# Altium PCB Oasis_Heater_Testing_PCB.PcbDoc
Units mil, origin at the board's own origin, x right, y up, seen from the top; angles counter-clockwise.
Board outline 1275 x 2430 mil, 2 copper layers (Top Layer, Bottom Layer), stack 62.992 mil thick; 17 components, 35 nets, 81 pads, 0 vias.
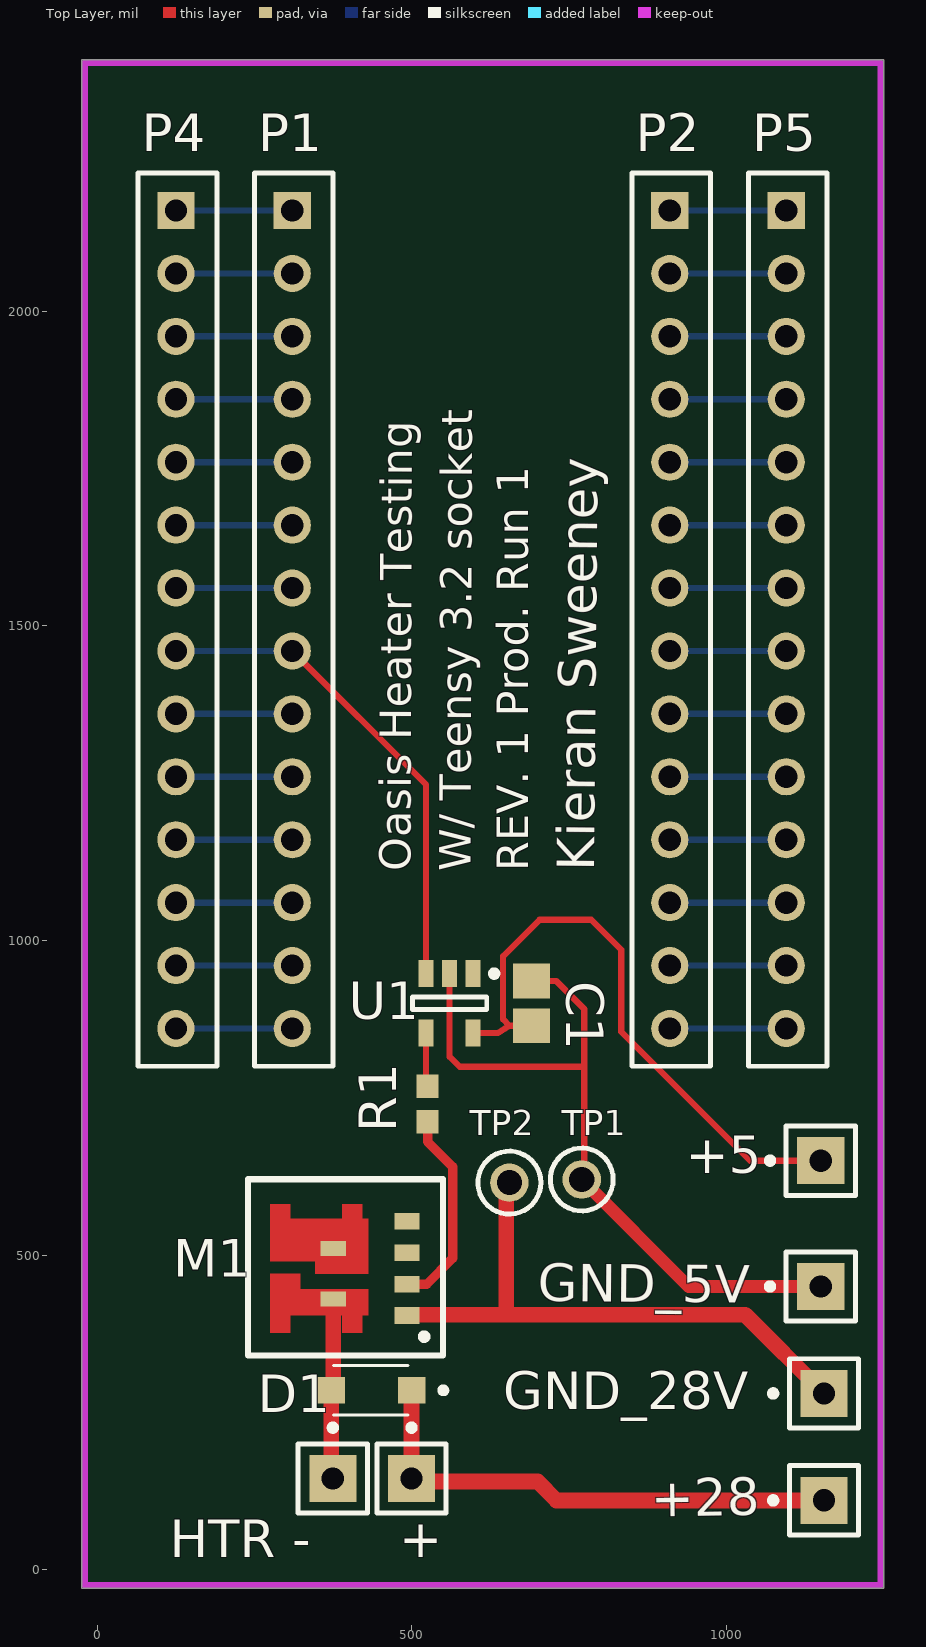
[diagram p0: Top Layer view]
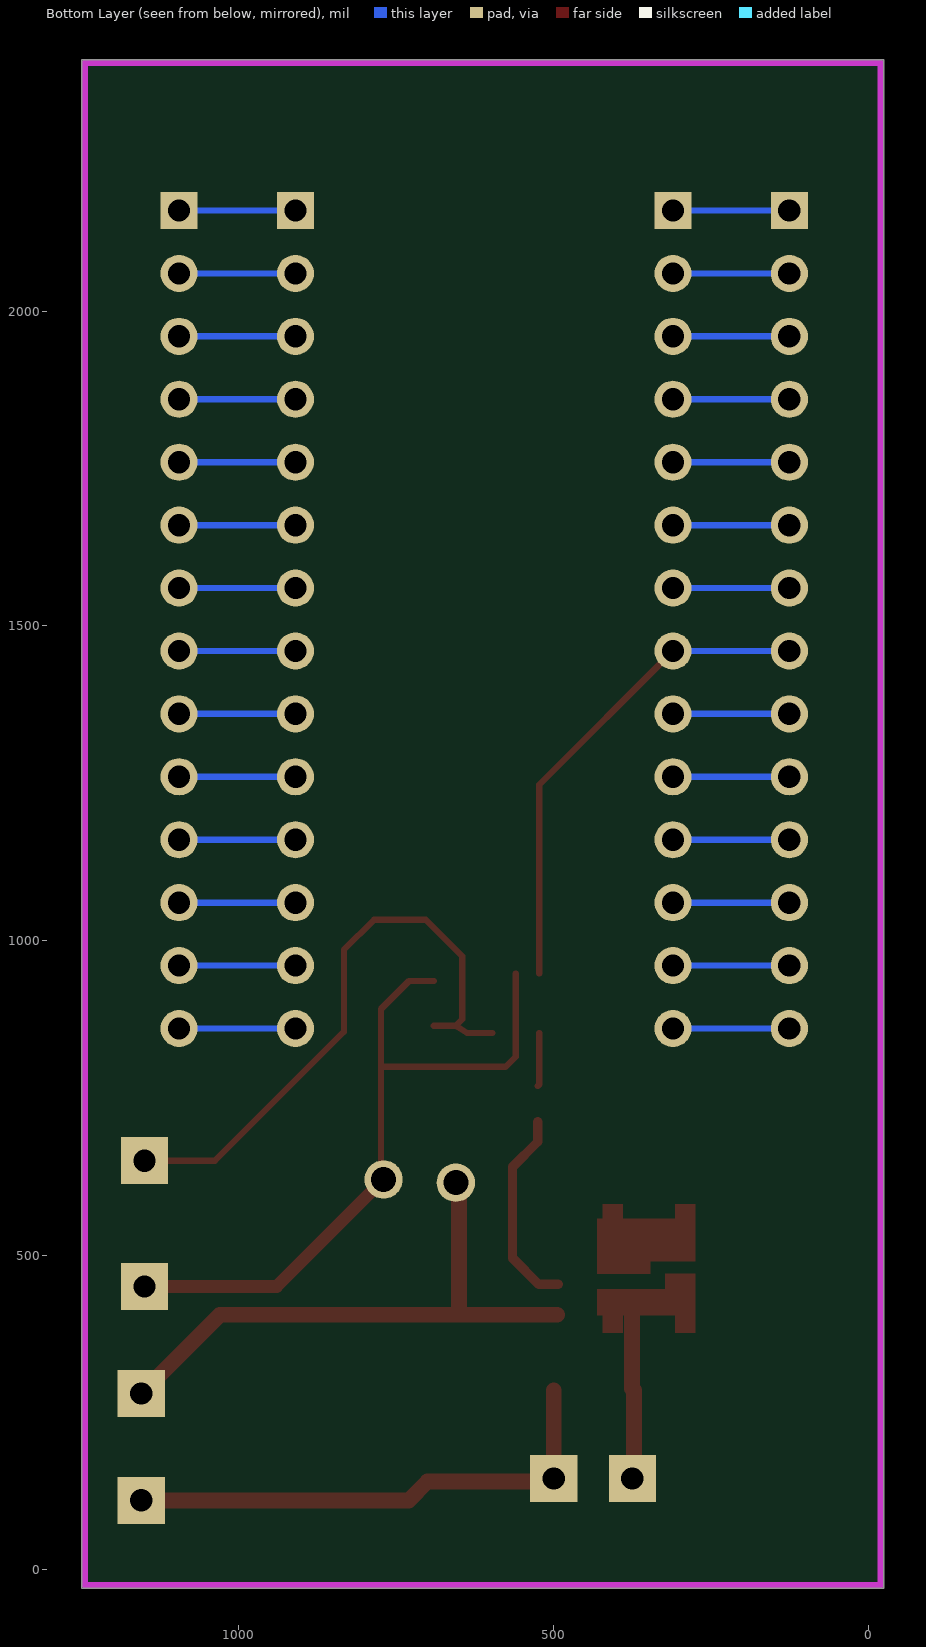
[diagram p1: Bottom Layer view, seen from below]
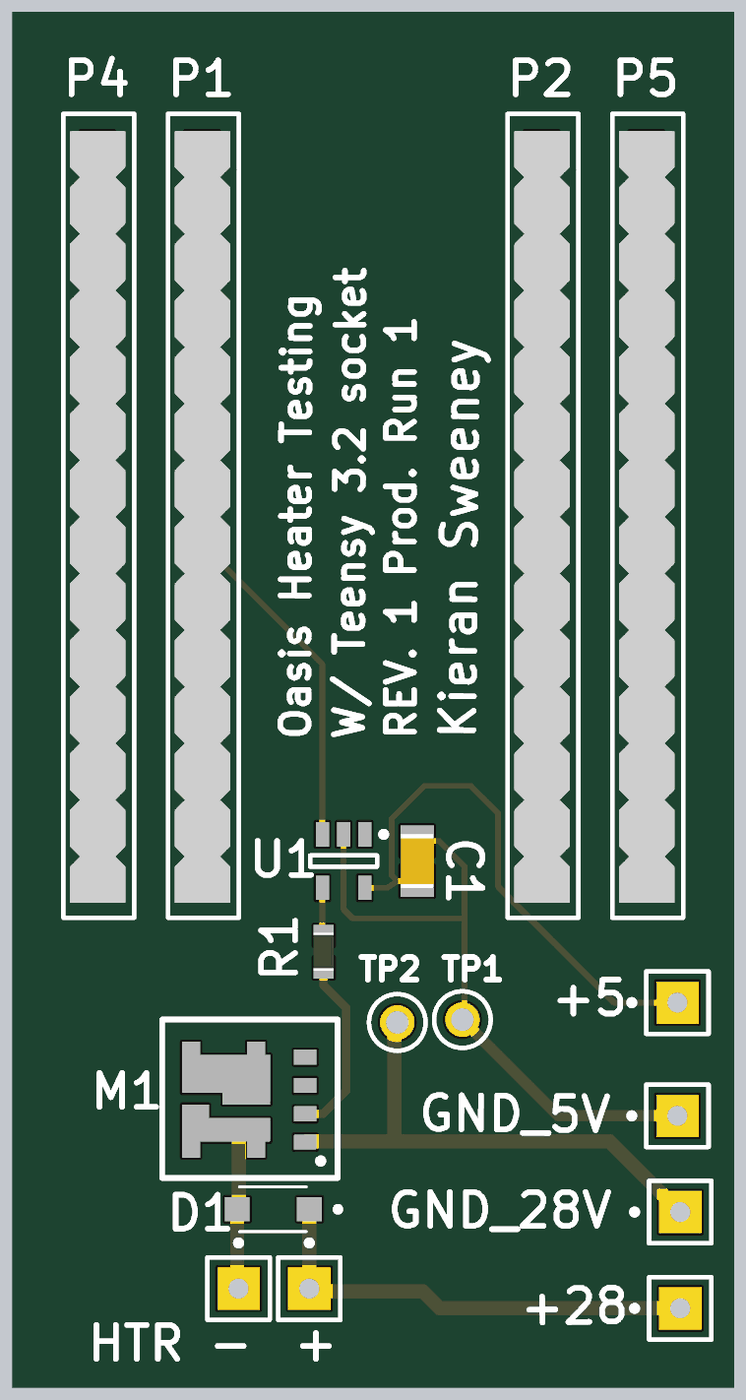
[diagram p2: 3D render of the assembled board from above, using the file's embedded part models]

## Layer stack, top to bottom
Top Solder: solder mask 1, SM-001, Dk 4
Top Layer: signal copper 1.378
Dielectric 1: prepreg 60.2361, PP-023, Dk 4.5
Bottom Layer: signal copper 1.378
Bottom Solder: solder mask 1, SM-001, Dk 4

## Board outline
-25,2400 -25,-30 1250,-30 1250,2400

## Design rules (kind name [scope] priority, off if disabled: settings)
BoardOutlineClearance [All] p1: gap=7.87 ignorepadtopadclearanceinfootprint=FALSE except(15.75: Arc-SplitBarrior Arc-SplitContinuation Track-SplitBarrior Track-SplitContinuation SMDPad-SplitBarrior SMDPad-SplitContinuation THPad-SplitBarrior THPad-SplitContinuation Via-SplitBarrior Via-SplitContinuation Fill-SplitBarrior Fill-SplitContinuation Poly-SplitBarrior Poly-SplitContinuation Region-SplitBarrior Region-SplitContinuation Text-SplitBarrior Text-SplitContinuation)
Clearance "Clearance Bottom Layer" [OnLayer('Bottom Layer')] p1: gap=8 ignorepadtopadclearanceinfootprint=TRUE except(10: Arc-Text Track-Text SMDPad-Text THPad-Text Via-Text Fill-Text Poly-Text Region-Text Text-Text)
Clearance "Clearance Top Layer" [OnLayer('Top Layer')] p2: gap=8 ignorepadtopadclearanceinfootprint=TRUE except(10: Arc-Text Track-Text SMDPad-Text THPad-Text Via-Text Fill-Text Poly-Text Region-Text Text-Text)
Clearance [All] p3: gap=7.87 ignorepadtopadclearanceinfootprint=FALSE except(3.5: Arc-Arc Arc-Track Arc-SMDPad Track-Track Track-SMDPad SMDPad-SMDPad; 5: Arc-Via Track-Via SMDPad-Via THPad-Via Via-Via; 10: Arc-Text Track-Text SMDPad-Text THPad-Text Via-Text Fill-Text Poly-Text Region-Text Text-Text)
HoleSize [All] p1: absolutevalues=TRUE maxlimit=248.03 minlimit=7.87 maxpercent=80.000 minpercent=20.000
MinimumAnnularRing [All] p1: minimumring=3
MinimumSolderMaskSliver [All] p1: minsoldermaskwidth=3.94
PolygonConnect PolygonConnect_1 [All] p1: thpad.connectstyle=Relief thpad.reliefconductorwidth=20 thpad.reliefentries=4 thpad.polygonreliefangle="90 Angle" thpad.airgapwidth=10 smdpad.connectstyle=Relief smdpad.reliefconductorwidth=20 smdpad.reliefentries=4 smdpad.polygonreliefangle="90 Angle" smdpad.airgapwidth=10 via.connectstyle=Direct via.reliefconductorwidth=20 via.reliefentries=4 via.polygonreliefangle="90 Angle" via.airgapwidth=10
RoutingCorners [All] p1: cornerstyle=Round minsetback=100 maxsetback=100
RoutingVias [All] p1: holewidth=19.68 width=39.37 viastyle="Through Hole" minholewidth=7.87 minwidth=17.72 maxholewidth=39.37 maxwidth=78.74
SilkToSilkClearance [All] p1: silktosilkclearance=3.94
SilkToSolderMaskClearance [IsPad] p1: minsilkscreentomaskgap=3.94 clearancetoexposedcopper=TRUE
SolderMaskExpansion [All] p1: expansion=4 istentingtop=FALSE
Width [All] p1: maxlimit=100 minlimit=3.5 preferedwidth=15
25 further rules are at their usual default settings.

## Components (designator, comment, footprint, x,y, rotation, side; value= is the part's Value field where it differs from the comment)
+ "Socket" PIN1 499.49,144.84 r0 top (schematic designator HTR+)
+5 "Socket" PIN1 1150,650 r90 top
+28 "Socket" PIN1 1155,110 r90 top
C1 "10uF Capacitor" IMPERIAL0805_CAPACITOR 690,900 r90 top value=10uF
D1 "STPS1L40ZF" *SODFL3718X108N 435,285 r180 top
GND_5V "Socket" PIN1 1150,450 r90 top
GND_28V "Socket" PIN1 1155,280 r90 top
"HTR -" "Plug" PIN1 374.49,144.84 r0 top (schematic designator HTR-)
M1 "NPN MOSFET" "PowerPAK SO-8L DUAL ASYMMETRIC" 549.61,340.24 r90 top
P1 "Header for Teensy 3.2" BL114G 310,2160 r270 top
P2 "Header for Teensy 3.2" BL114G 910,2160 r270 top
P4 "Header for Teensy 3.2" BL114G 125,2160 r270 top
P5 "Header for Teensy 3.2" BL114G 1095,2160 r270 top
R1 "CRCW0603100RFKEAC" Imperial0603_RES 525,740 r90 top value=100
TP1 "GND_5V" KSTN-5004 770,620 r0 top
TP2 "GND_28" KSTN-5004 655,615 r0 top
U1 "LTC1981ES5#TRMPBF" LT-S5-5-SOT-23_N 560,900 r270 top

## Footprints (in the part's own frame and the unit in brackets; to place one, negate y for a bottom-side part, rotate by r counter-clockwise, add the part's x,y. Pads: shape width x height; smd on the part's side, far side on the other; paste and mask are expansions set on the pad)
*SODFL3718X108N [mm]
  rect 1.12x1.08 smd: A(1.6,0) C(-1.645,0)
  silkscreen extent -3.04,-1 1.5,1, body extent -1.52,-1.02 1.52,1.02, height 0.97
BL114G [mm] "Connector; Header; 14 Position"
  rect 1.5x1.5 hole 0.9: 1(0,0)
  round 1.5 hole 0.9: 2(2.54,0) 3(5.08,0) 4(7.62,0) 5(10.16,0) 6(12.7,0) 7(15.24,0) 8(17.78,0) 9(20.32,0) 10(22.86,0) 11(25.4,0) 12(27.94,0) 13(30.48,0) 14(33.02,0)
  silkscreen extent -1.52,-1.52 34.54,1.65, body extent -0.76,-1.23 33.88,1.27, height 8.18
Imperial0603_RES [mm] "Imperial 0603 resistor footprint"
  rect 0.95x0.9 smd: 1(-0.725,0) 2(0.725,0)
  body extent -0.85,-0.45 0.85,0.45, height 0.55
IMPERIAL0805_CAPACITOR [mm] "Chip Capacitor, 2-Leads, Body 2.13x1.27mm, IPC Medium Density"
  rect 1.4x1.5 smd: 1(-0.9,0) 2(0.9,0)
  body extent -1.22,-0.75 1.22,0.75, height 0.45
KSTN-5004 [mm] "Test Point, Through Hole, Dia 2.54mm"
  round 1.55 hole 1.016: 1(0,0)
  silkscreen extent -1.27,-1.27 1.27,1.27, body extent -1.27,-1.27 1.27,1.27, height 4.57
LT-S5-5-SOT-23_N [mm] "SOT23, 5-Leads, Body 3x1.75mm, Pitch 0.95mm, IPC Medium Density"
  rect 1.1x0.6 smd: 1(-1.2,0.95) 2(-1.2,0) 3(-1.2,-0.95) 4(1.2,-0.95) 5(1.2,0.95)
  silkscreen extent -1.32,-1.5 0.25,1.93, body extent -0.87,-1.5 0.87,1.5, height 1.45
PIN1 [mm] "Connector; Plug"
  rect 1.905x1.905 hole 0.9: 1(0,0)
  silkscreen extent -1.4,-1.4 1.4,2.17
"PowerPAK SO-8L DUAL ASYMMETRIC" [mm]
  rect 0.68x1.02 smd: 1(1.61,1.455) 2(2.88,1.455) 3(4.15,1.455) 4(5.42,1.455)
  rect 0.59x1.02 smd paste-1 mask-1: 5(2.28,4.435) 6(4.32,4.435)
  Top Layer region: 7.874,-1.016
  Top Layer region: 0.915,6.985 3.3,6.985 3.3,5.775 2.685,5.775 2.685,3.025 1.625,3.025 1.625,3.255 0.915,3.255 0.915,4.065 1.625,4.065 1.625,6.175 0.915,6.175
  Top Layer region: 3.81,6.985 6.115,6.985 6.115,6.175 5.53,6.175 5.53,4.065 6.115,4.065 6.115,3.255 5.53,3.255 5.53,3.025 3.3,3.025 3.3,5.165 3.81,5.165
  Top Layer region: 4.58,5.715
  Top Layer region: 4.58,6.35
  silkscreen extent 0,0 7.11,7.87, body extent 1.27,1.4 5.71,6.6, height 1.02

## Part data
C1: library part C2012X8L1A106K125AE, "10 uF Capacitor", Supplier Part Number=C2012X8L1A106K125AE
D1: "1A Schottky Diode", Supplier Part Number 1=511-STPS1L40ZF, Supplier 1=Mouser
M1: library part SQJ208EP-T1_GE3, "Two NPN Power Transistors for heater power control", Supplier Part Number 1=78-SQJ208EP-T1_GE3, Supplier 1=Mouser
P1 P2 P4 P5: library part BL114G, "14-pin header, to be used with Teensy 3.2"
R1: "100 Ohm Resistor", Supplier Part Number 1=541-100HCT-ND, Supplier 1=Digi-Key
TP1 TP2: library part CMP-2000-05575-1, "Test Point, Yellow, 1-Pin THD, RoHS, Bulk", Manufacturer=Keystone, Package Description="1-Pin Through Hole Device, Dia 2.54 mm", Package Reference=5004, Datasheet URL=http://www.keyelco.com/product-pdf.cfm?p=1313, Datasheet Version="Rev. G, 12/2008", Manufacturer URL=http://www.keyelco.com/, Mounting Technology=ThroughHole
U1: library part CMP-0479-00408-1, "Single and Dual Micropower High Side Switch Controller, 1.8 to 5.5 V Vin, 5-pin SOT23 (S5-5), -40 to 85 degC, Pb-Free, Mini Tape and Reel", Manufacturer="Linear Technology", ComponentLink1Description="Manufacturer URL", ComponentLink1URL=http://www.linear.com/, ComponentLink2Description=Datasheet, ComponentLink2URL=http://cds.linear.com/docs/en/datasheet/19812fs.pdf, ComponentLink3Description="Package Specification", ComponentLink3URL=http://cds.linear.com/docs/en/datasheet/17278fb.pdf, Mounting Technology="Surface Mount", PackageDescription="5-Pin Plastic SOT-23, Body 1.625 x 2.90 mm, Pitch 0.95 mm", PackageReference=S5-5, PackageVersion=Aug-07, Packing="Mini Tape and Reel", PartNumber=LTC1981ES5#TRMPBF, RoHS=TRUE
+ +5 +28 GND_5V GND_28V "HTR -": LatestRevisionDate=17-Jul-2002, LatestRevisionNote="Re-released for DXP Platform.", Publisher="Altium Limited"

## Nets (pads, with @x,y where several pads share a name; then routed paths per layer and width w, separated by ;. In a path a pad name is that pad's centre, name@x,y a point inside that pad or via, vN(x,y) a via of type N, cw(c..) or ccw(c..) an arc to the next point about the centre after c; other vN are vias at no path point)
+5: +5.1 C1.1 U1.5 | length 989.5
  Top Layer w10: U1.5 637,852.76 655,864.57 ; C1.1 655,864.57 ; +5.1@1165,650 1038,650 833,855 833,985 785,1033 703,1033 645,975 645,874.57 655,864.57
+28: +28.1 +.1 D1.C | length 810.2
  Top Layer w10: +.1 +.1@504.33,140 ; D1.C@499.49,284.72 D1.C
  Top Layer w25: +.1 D1.C@499.49,284.72 ; +.1@504.33,140 700,140 730,110 +28.1
GND_5V: C1.2 GND_5V.1 TP1.1 U1.2 | length 1193.3
  Top Layer w10: U1.2 560,815 576,799 774,799 ; C1.2 729.57,935.43 774,891 774,799 ; TP1.1 774,624 774,799
  Top Layer w20: TP1.1 940,450 GND_5V.1@1165,450
GND_28V: GND_28V.1 M1.1 TP2.1 | length 927.1
  Top Layer w10: M1.1 M1.1@493.7,405 ; TP2.1@650,610 TP2.1
  Top Layer w25: M1.1@493.7,405 650,405 ; TP2.1@650,610 650,405 ; GND_28V.1 1030,405 650,405
NetD1_2: "HTR -.1" D1.A M1.5 | length 287.4
  Top Layer w10: 372.01,147.32 374.49,144.84 ; D1.A D1.A@375,287.99
  Top Layer w25: 372.01,147.32 D1.A ; D1.A@375,287.99 M1.5
NetM1_2: M1.2 R1.1 | length 322.8
  Top Layer w15: M1.2 523.62,453.62 565,495 565,640 525,680 R1.1
NetP1_1: P1.1 P4.1 | length 185
  Bottom Layer w10: P4.1 P1.1
NetP1_2: P1.2 P4.2 | length 185
  Bottom Layer w10: P4.2 P1.2
NetP1_3: P1.3 P4.3 | length 185
  Bottom Layer w10: P4.3 P1.3
NetP1_4: P1.4 P4.4 | length 185
  Bottom Layer w10: P4.4 P1.4
NetP1_5: P1.5 P4.5 | length 185
  Bottom Layer w10: P4.5 P1.5
NetP1_6: P1.6 P4.6 | length 185
  Bottom Layer w10: P4.6 P1.6
NetP1_7: P1.7 P4.7 | length 185
  Bottom Layer w10: P4.7 P1.7
NetP1_8: P1.8 P4.8 U1.3 | length 785.8
  Top Layer w10: P1.8 522.6,1247.4 U1.3
  Bottom Layer w10: P4.8 P1.8
NetP1_9: P1.9 P4.9 | length 185
  Bottom Layer w10: P4.9 P1.9
NetP1_10: P1.10 P4.10 | length 185
  Bottom Layer w10: P4.10 P1.10
NetP1_11: P1.11 P4.11 | length 185
  Bottom Layer w10: P4.11 P1.11
NetP1_12: P1.12 P4.12 | length 185
  Bottom Layer w10: P4.12 P1.12
NetP1_13: P1.13 P4.13 | length 185
  Bottom Layer w10: P4.13 P1.13
NetP1_14: P1.14 P4.14 | length 185
  Bottom Layer w10: P4.14 P1.14
NetP2_1: P2.1 P5.1 | length 185
  Bottom Layer w10: P2.1 P5.1
NetP2_2: P2.2 P5.2 | length 185
  Bottom Layer w10: P2.2 P5.2
NetP2_3: P2.3 P5.3 | length 185
  Bottom Layer w10: P2.3 P5.3
NetP2_4: P2.4 P5.4 | length 185
  Bottom Layer w10: P2.4 P5.4
NetP2_5: P2.5 P5.5 | length 185
  Bottom Layer w10: P2.5 P5.5
NetP2_6: P2.6 P5.6 | length 185
  Bottom Layer w10: P2.6 P5.6
NetP2_7: P2.7 P5.7 | length 185
  Bottom Layer w10: P2.7 P5.7
NetP2_8: P2.8 P5.8 | length 185
  Bottom Layer w10: P2.8 P5.8
NetP2_9: P2.9 P5.9 | length 185
  Bottom Layer w10: P2.9 P5.9
NetP2_10: P2.10 P5.10 | length 185
  Bottom Layer w10: P2.10 P5.10
NetP2_11: P2.11 P5.11 | length 185
  Bottom Layer w10: P2.11 P5.11
NetP2_12: P2.12 P5.12 | length 185
  Bottom Layer w10: P2.12 P5.12
NetP2_13: P2.13 P5.13 | length 185
  Bottom Layer w10: P2.13 P5.13
NetP2_14: P2.14 P5.14 | length 185
  Bottom Layer w10: P2.14 P5.14
NetR1_2: R1.2 U1.4 | length 85.2
  Top Layer w10: U1.4 522.6,770.95 R1.2
pads on no net: M1.3 M1.4 M1.6 U1.1

## Keep-outs
Keep-Out Layer:
  lines w10: -20,-25 -20,2395 1245,2395 1245,-25 -20,-25

## Silkscreen, mask and mechanical layers (free items; w line width, h text height)
Top Overlay:
  text "Oasis Heater Testing" at 498.37,1110.09 h50 r89.81
  text "W/ Teensy 3.2 socket" at 593.37,1110.09 h50 r89.8
  text "REV. 1 Prod. Run 1" at 685,1110 h50 r90
  text "Kieran Sweeney" at 790.1,1110.27 h60 r89.48